# Altium PCB PCB1.PcbDoc
Units mm, origin at the board's own origin, x right, y up, seen from the top; angles counter-clockwise.
Board outline 85.5 x 86.12 mm, 2 copper layers (Top Layer, Bottom Layer); 50 components, 30 nets, 122 pads, 98 vias.
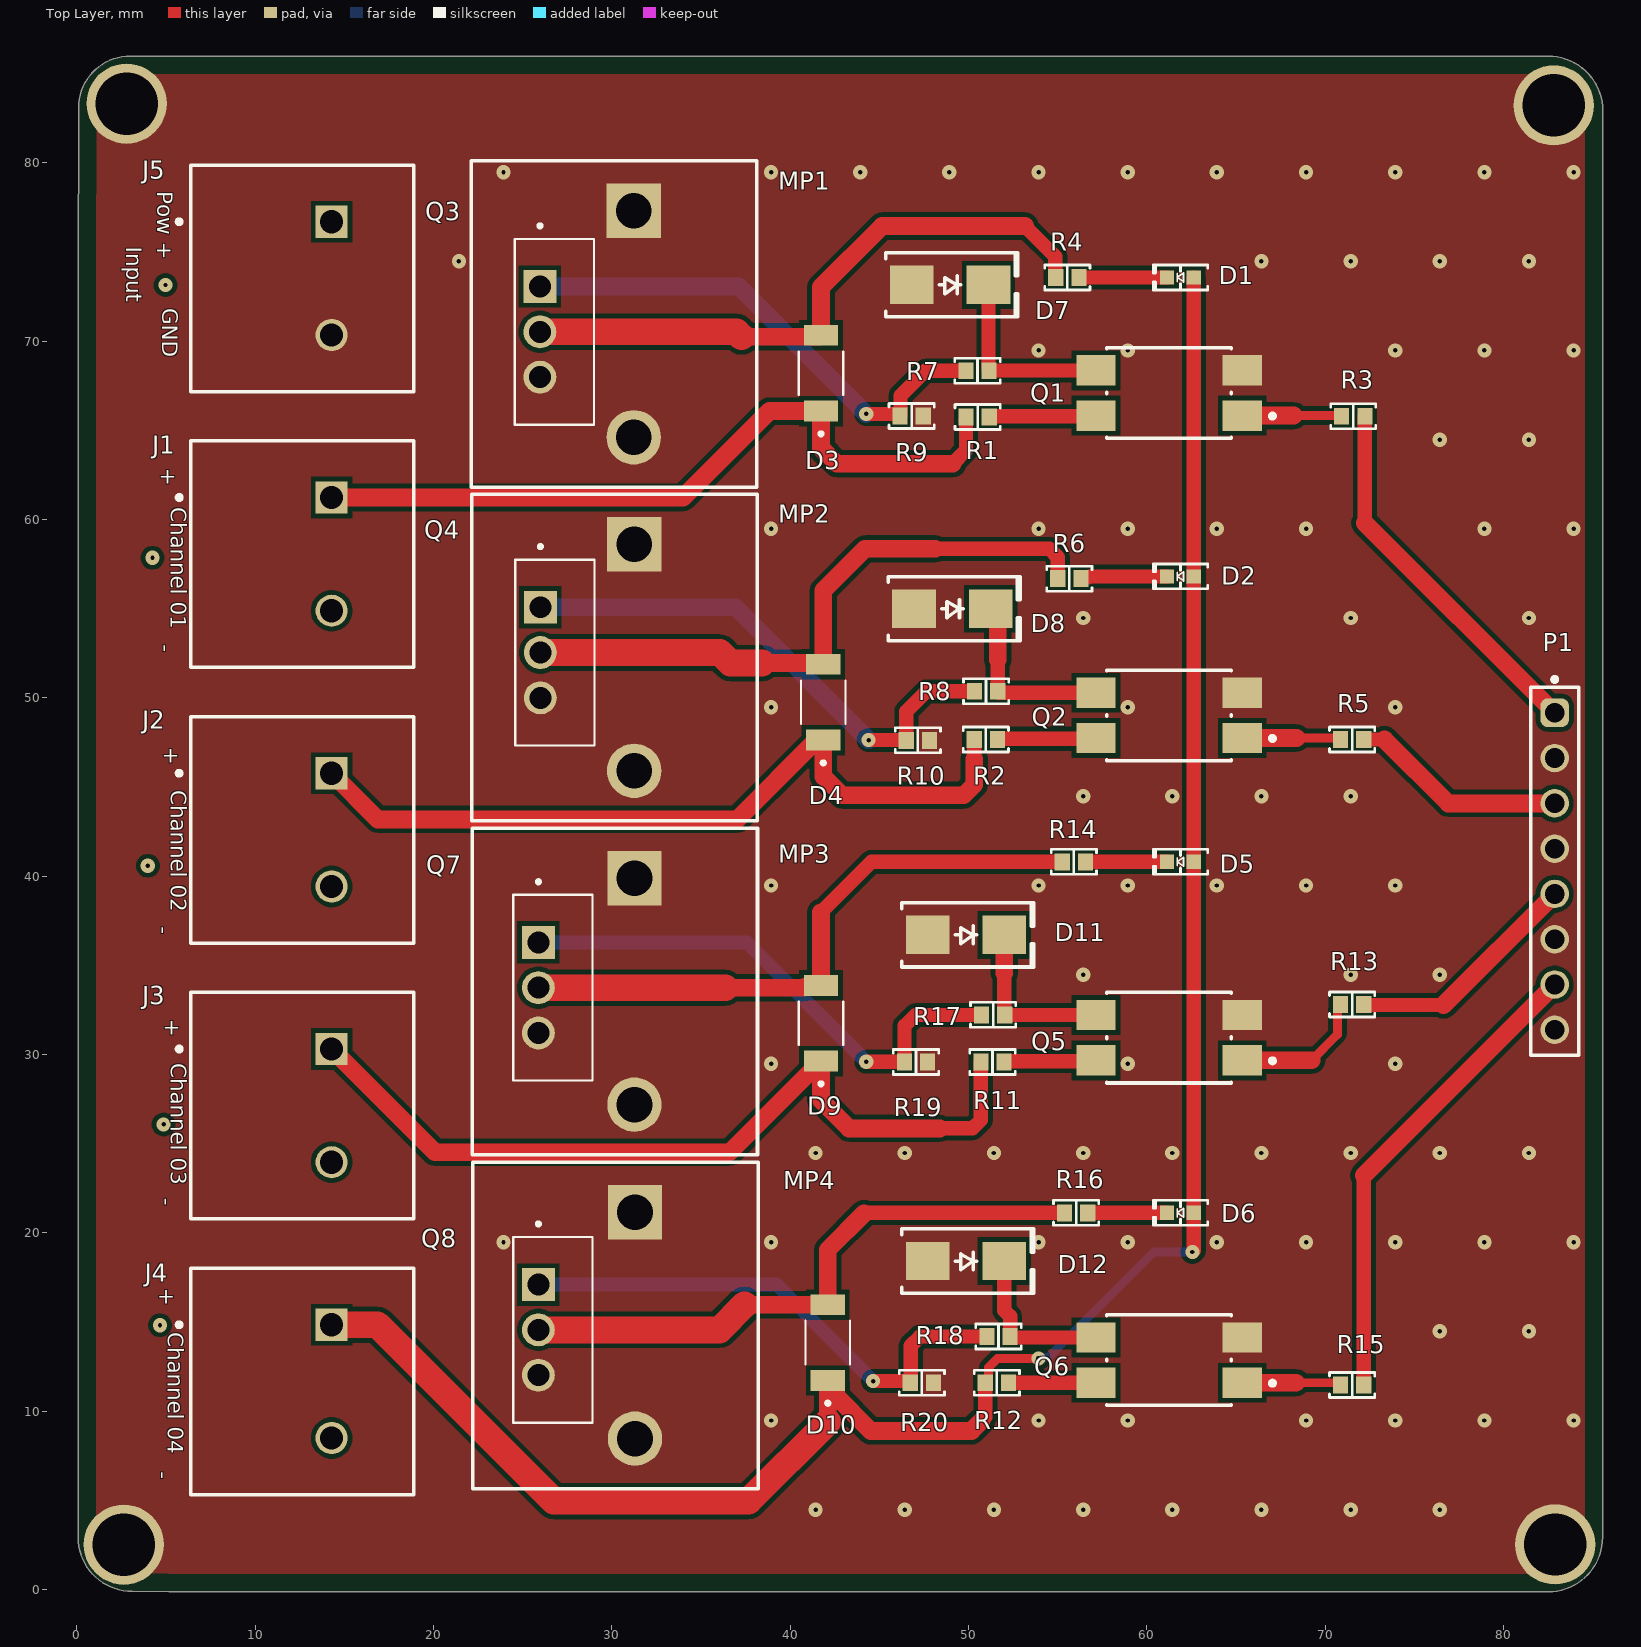
[diagram p0: Top Layer view]
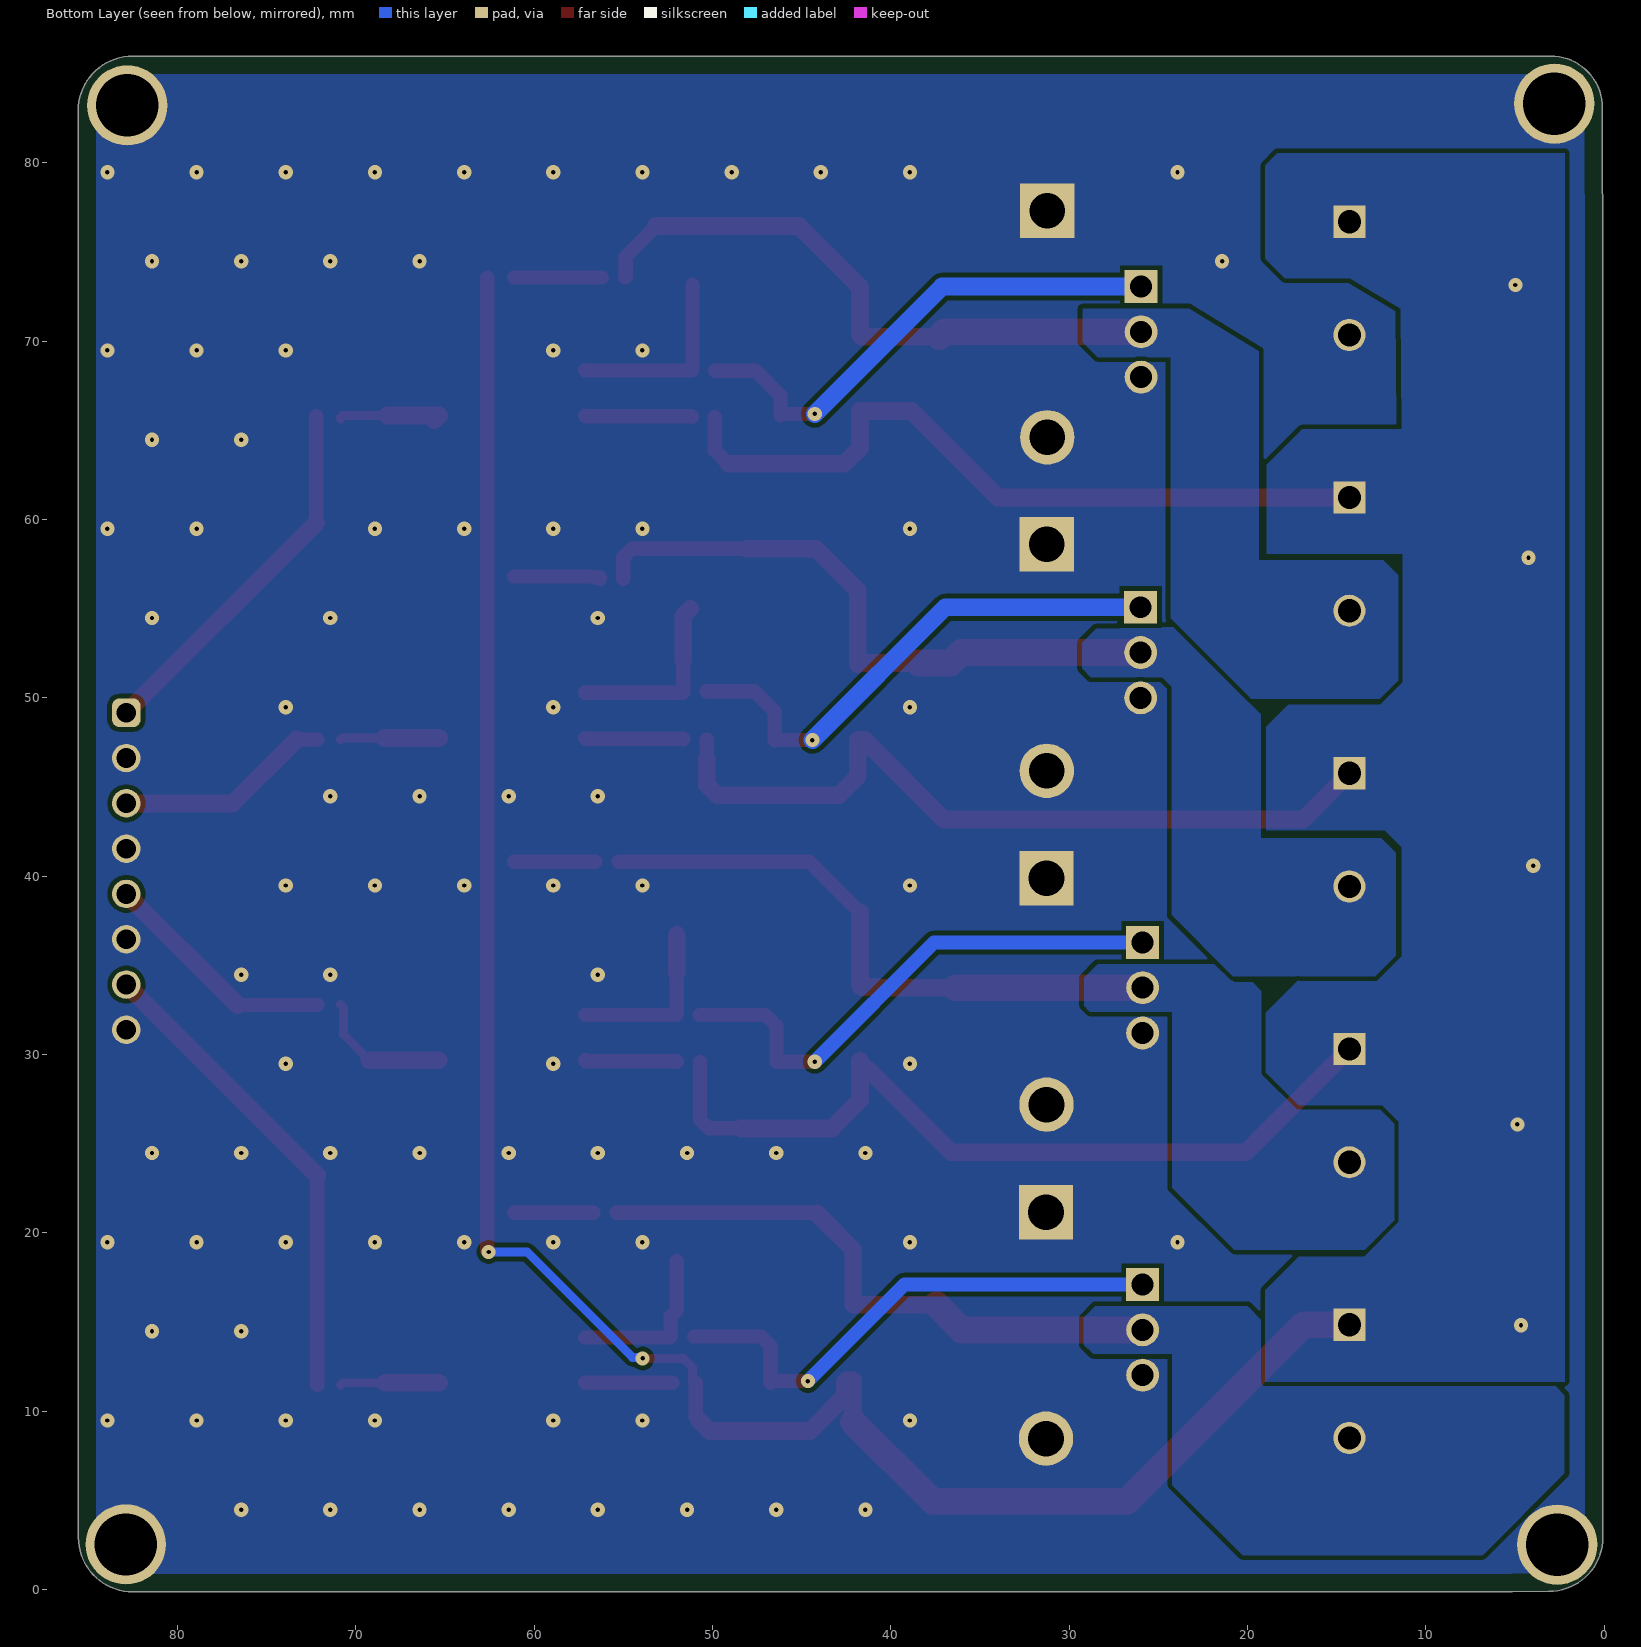
[diagram p1: Bottom Layer view, seen from below]
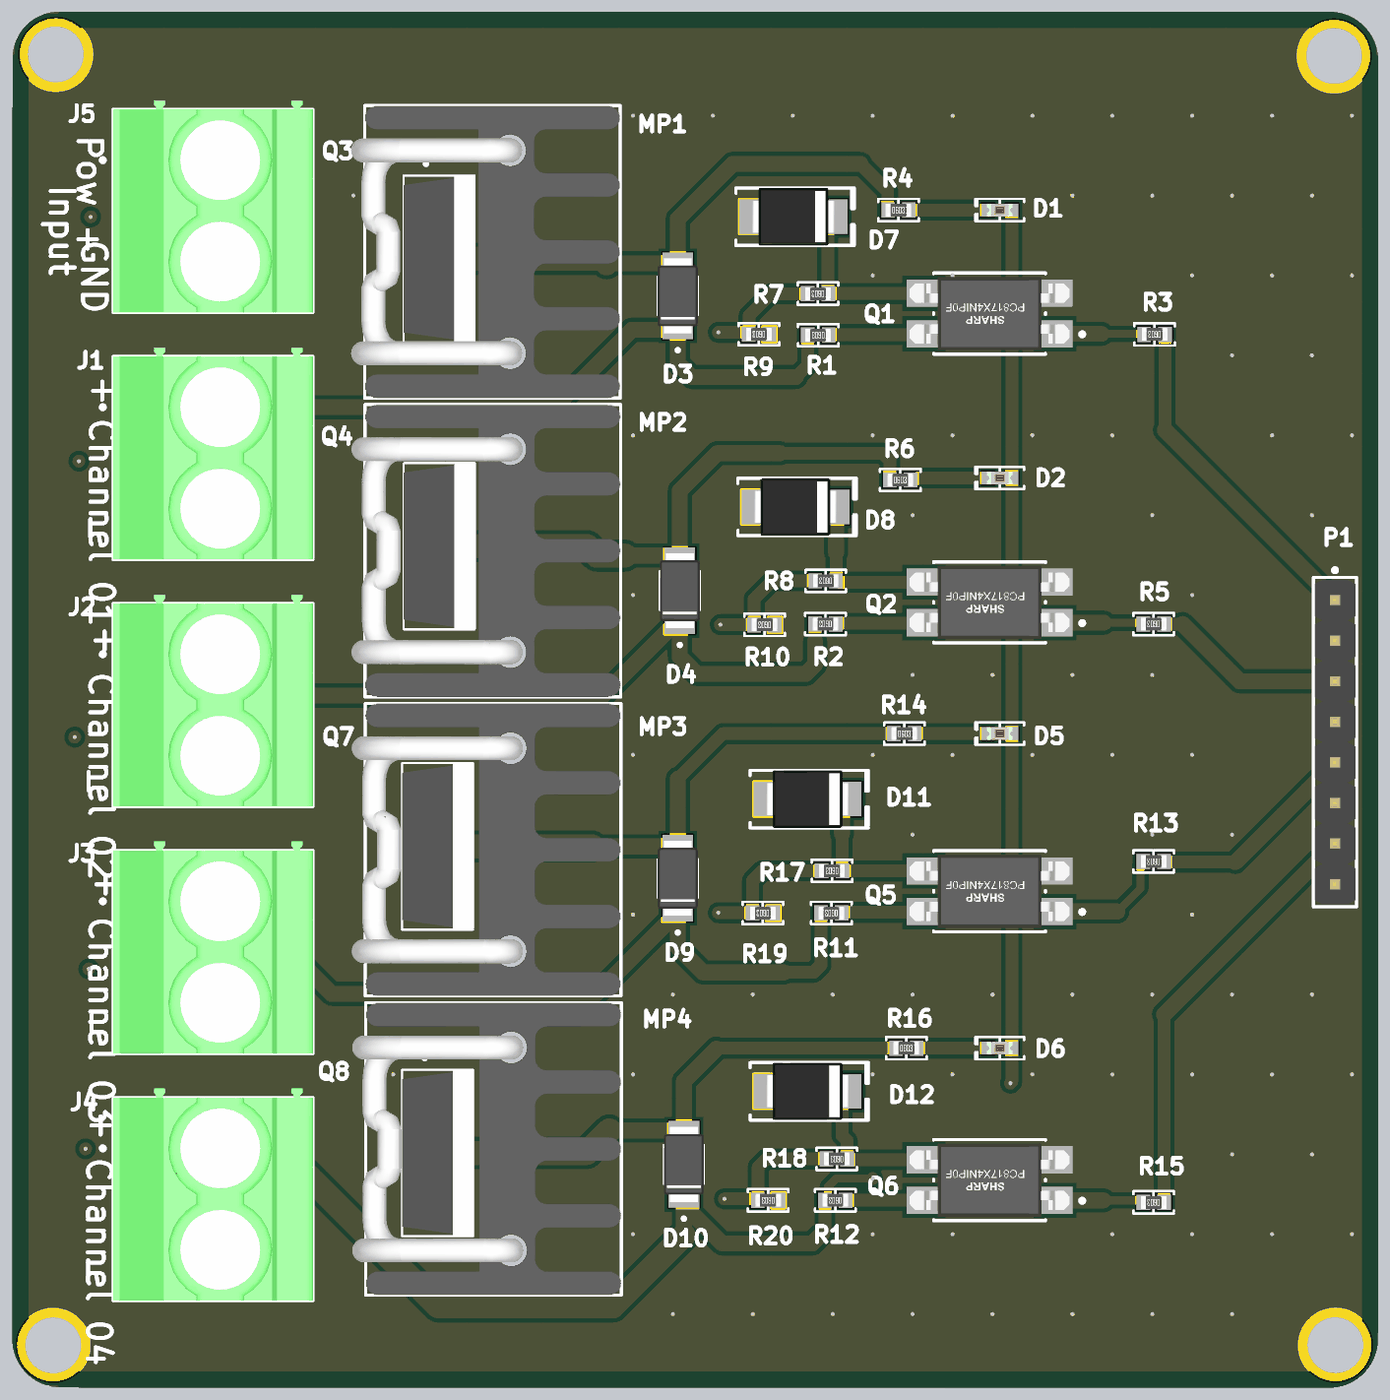
[diagram p2: 3D render of the assembled board from above, using the file's embedded part models]

## Layer stack, top to bottom
Top Solder: solder mask 0.0102, Solder Resist, Dk 3.5
Top Layer: signal copper 0.0356
Dielectric 1: dielectric 0.32, FR-4, Dk 4.8
Bottom Layer: signal copper 0.0356
Bottom Solder: solder mask 0.0102, Solder Resist, Dk 3.5

## Board outline
0.076,2.919 0.076,73.403 0.102,83.072 cw(c3.007,83.072) 3.007,85.976 72.974,85.976 82.51,85.976 cw(c82.51,82.911) 85.575,82.911 85.557,2.92 cw(c82.497,2.92) 82.497,-0.14 5.156,-0.13 3.106,-0.111 cw(c3.106,2.919)

## Design rules (kind name [scope] priority, off if disabled: settings)
BoardOutlineClearance [All] p1: gap=1 ignorepadtopadclearanceinfootprint=FALSE
Clearance "Stitching NetD3_A" [IsStitchingVia and InNet('NetD3_A') vs (IsVia and (Not IsStitchingVia)) Or IsPad] p1: gap=4 ignorepadtopadclearanceinfootprint=FALSE
Clearance [All] p2: gap=0.254 ignorepadtopadclearanceinfootprint=FALSE except(0: Arc-Hole Track-Hole SMDPad-Hole THPad-Hole Via-Hole Fill-Hole Poly-Hole Region-Hole Text-Hole)
ComponentClearance [All] p1: gap=0.01 collisioncheckmode=3 verticalgap=0.01 showdistances=FALSE
Height [All] p1: minheight=0 maxheight=254 prefheight=12.7
HoleSize [All] p1: absolutevalues=TRUE maxlimit=5 minlimit=0.2 maxpercent=80.000 minpercent=20.000
MinimumSolderMaskSliver [All] p1: minsoldermaskwidth=0.001
PolygonConnect [All] p1: connectstyle=Direct reliefconductorwidth=0.254 reliefentries=4 polygonreliefangle="90 Angle" airgapwidth=0.254
RoutingVias [All] p1: holewidth=0.711 width=1.27 viastyle="Through Hole" minholewidth=0.2 minwidth=0.8 maxholewidth=0.711 maxwidth=1.27
SilkToSolderMaskClearance [IsPad] p1: minsilkscreentomaskgap=1 clearancetoexposedcopper=TRUE
SolderMaskExpansion [All] p1: expansion=0.102 istentingtop=FALSE
Width [All] p1: maxlimit=5 minlimit=0.254 preferedwidth=0.254
25 further rules are at their usual default settings.

## Components (designator, comment, footprint, x,y, rotation, side; value= is the part's Value field where it differs from the comment)
D1 "Red" "LED 0603_1608 RED" 61.887,73.564 r180 top
D2 "Red" "LED 0603_1608 RED" 61.887,56.8 r180 top
D3 "SS54FSH" SODFL4725X110N 41.732,68.196 r90 top
D4 "SS54FSH" SODFL4725X110N 41.859,49.747 r90 top
D5 "Red" "LED 0603_1608 RED" 61.887,40.798 r180 top
D6 "Red" "LED 0603_1608 RED" 61.887,21.113 r180 top
D7 "SMBJ5349B" "DO214AA SMB" 48.971,73.149 r0 top
D8 "SMBJ5349B" "DO214AA SMB" 49.098,54.988 r0 top
D9 "SS54FSH" SODFL4725X110N 41.732,31.747 r90 top
D10 "SS54FSH" SODFL4725X110N 42.113,13.84 r90 top
D11 "SMBJ5349B" "DO214AA SMB" 49.86,36.7 r0 top
D12 "SMBJ5349B" "DO214AA SMB" 49.86,18.412 r0 top
J1 "1714955" PHOE-1714955_V 14.293,58.052 r270 top
J2 "1714955" PHOE-1714955_V 14.293,42.59 r270 top
J3 "1714955" PHOE-1714955_V 14.293,27.127 r270 top
J4 "1714955" PHOE-1714955_V 14.293,11.665 r270 top
J5 "1714955" PHOE-1714955_V 14.293,73.514 r270 top
MP1 "WA-T220-101E" FP-WA-T220-101E-MFG 30.132,70.95 r270 top
MP2 "WA-T220-101E" FP-WA-T220-101E-MFG 30.156,52.248 r270 top
MP3 "WA-T220-101E" FP-WA-T220-101E-MFG 30.173,33.534 r270 top
MP4 "WA-T220-101E" FP-WA-T220-101E-MFG 30.202,14.806 r270 top
P1 "61300811121" 61300811121 82.87,40.266 r270 top
Q1 "PC817X4NIP0F" FP-PC817X4NIP0F-MFG 61.247,67.087 r180 top
Q2 "PC817X4NIP0F" FP-PC817X4NIP0F-MFG 61.247,49.011 r180 top
Q3 "IRL540N" TO254P1054X469X1930-3 26.782,70.516 r270 top
Q4 "IRL540N" TO254P1054X469X1930-3 26.806,52.531 r270 top
Q5 "PC817X4NIP0F" FP-PC817X4NIP0F-MFG 61.247,30.934 r180 top
Q6 "PC817X4NIP0F" FP-PC817X4NIP0F-MFG 61.247,12.858 r180 top
Q7 "IRL540N" TO254P1054X469X1930-3 26.696,33.739 r270 top
Q8 "IRL540N" TO254P1054X469X1930-3 26.694,14.552 r270 top
R1 "4.7 kOhms" "RES 0603_1608" 50.519,65.737 r180 top
R2 "4.7 kOhms" "RES 0603_1608" 50.975,47.656 r180 top
R3 "1 kOhms" "RES 0603_1608" 71.577,65.783 r180 top
R4 "4.7 kOhms" "RES 0603_1608" 55.547,73.564 r0 top
R5 "1 kOhms" "RES 0603_1608" 71.519,47.656 r180 top
R6 "4.7 kOhms" "RES 0603_1608" 55.659,56.673 r0 top
R7 "100 Ohms" "RES 0603_1608" 50.509,68.332 r180 top
R8 "100 Ohms" "RES 0603_1608" 50.989,50.36 r180 top
R9 "4.7 kOhms" "RES 0603_1608" 46.813,65.796 r180 top
R10 "4.7 kOhms" "RES 0603_1608" 47.166,47.608 r180 top
R11 "4.7 kOhms" "RES 0603_1608" 51.347,29.57 r180 top
R12 "4.7 kOhms" "RES 0603_1608" 51.595,11.588 r180 top
R13 "1 kOhms" "RES 0603_1608" 71.519,32.797 r180 top
R14 "4.7 kOhms" "RES 0603_1608" 55.913,40.798 r0 top
R15 "1 kOhms" "RES 0603_1608" 71.519,11.461 r180 top
R16 "4.7 kOhms" "RES 0603_1608" 56.04,21.113 r0 top
R17 "100 Ohms" "RES 0603_1608" 51.385,32.214 r180 top
R18 "100 Ohms" "RES 0603_1608" 51.687,14.177 r180 top
R19 "4.7 kOhms" "RES 0603_1608" 47.059,29.57 r180 top
R20 "4.7 kOhms" "RES 0603_1608" 47.389,11.588 r180 top

## Footprints (in the part's own frame and the unit in brackets; to place one, negate y for a bottom-side part, rotate by r counter-clockwise, add the part's x,y. Pads: shape width x height; smd on the part's side, far side on the other; paste and mask are expansions set on the pad)
61300811121 [mm] "Pin Header, pitch 2.54 mm, THT, Vertical, single row, 8p"
  rrect50% 1.6x1.6 hole 1.1: 1(-8.89,0)
  round 1.6 hole 1.1: 2(-6.35,0) 3(-3.81,0) 4(-1.27,0) 5(1.27,0) 6(3.81,0) 7(6.35,0) 8(8.89,0)
  silkscreen extent -10.88,-1.35 10.31,1.35, body extent -10.16,-1.27 10.16,1.27, height 8.57
"DO214AA SMB" [mm] "Molded Diode, 2-Leads, Body 4.31x3.62mm, IPC Medium Density"
  rect 2.45x2.15 smd: 1(-2.15,0) 2(2.15,0)
  silkscreen extent -3.6,-1.8 3.8,1.8, body extent -2.6,-1.8 2.6,1.8, height 2.4
FP-PC817X4NIP0F-MFG [mm]
  rect 2.2x1.7 smd paste+0 mask+0: 1(-4.1,1.27) 2(-4.1,-1.27) 3(4.1,-1.27) 4(4.1,1.27)
  silkscreen extent -5.93,-2.54 3.5,2.54, body extent -5.3,-2.64 5.3,2.64, height 0.25
FP-WA-T220-101E-MFG [mm]
  rect 3.05x3.05 hole 2 paste-2539.97 mask+0: 1(-6.35,1.1)
  round 3.05 hole 2 paste-2539.97 mask+0: 2(6.35,1.1)
  silkscreen extent -9.15,-8 9.15,8, body extent -9.25,-8.1 9.25,8.1, height 0.25
"LED 0603_1608 RED" [mm] "Chip Diode, 2-Leads, Body 1.60x0.80mm, IPC Medium Density"
  rect 0.8x0.8 smd: 1(-0.75,0) 2(0.75,0)
  silkscreen extent -1.52,-0.7 1.52,0.7, body extent -0.8,-0.4 0.8,0.4, height 0.53
PHOE-1714955_V [mm] "Terminal Block, 2-Leads, Body 12.7x12.5mm, Pitch 6.35mm"
  rect 1.8x1.8 hole 1.3: 1(-3.175,0)
  round 1.8 hole 1.3: 2(3.175,0)
  silkscreen extent -6.35,-8.67 6.35,4.6, body extent -6.92,-7.9 6.35,4.6, height 21.51
"RES 0603_1608" [mm] "Chip Resistor, 2-Leads, Body 1.60x0.80mm, IPC Medium Density"
  rect 0.85x0.95 smd: 1(-0.65,0) 2(0.65,0)
  silkscreen extent -1.27,-0.7 1.27,0.7, body extent -0.8,-0.4 0.8,0.4, height 0.45
SODFL4725X110N [mm]
  rect 1.17x1.92 smd: A(2.125,0) C(-2.125,0)
  silkscreen extent -3.5,-1.25 1.22,1.25, body extent -2.35,-1.25 2.35,1.25, height 1.1
TO254P1054X469X1930-3 [mm]
  rect 1.845x1.845 / inner round 1.845 / far side rect 1.845x1.845 hole 1.23: 1(-2.54,-0.81)
  round 1.845 hole 1.23: 2(0,-0.81) 3(2.54,-0.81)
  silkscreen extent -6.04,-2.22 5.21,2.22, body extent -5.21,-2.22 5.21,2.22, height 19.3

## Part data
D1 D2 D5 D6: library part 5973005507F, "LED RED 0603 SMD", Current - Test=20mA, Device Package="0603 (1608 Metric)", Lens Color=0.68mm, manufacturer=Dialight, Millicandela Rating=90mcd, Supplier Device Package=0603, Supplier Part Number 1=350-4374-1-ND, Voltage - Forward (Vf) (Typ)=2V, Color=Red, componentlink1description=Datasheet, componentlink1url=http://www.dialightsignalsandcomponents.com/Assets/Drawings/2D_Drawings_DrawingDetailedSpec/NewDrawings/18369A.pdf, componentlink2description="DigiKey Link", componentlink2url=https://www.digikey.com/en/products/detail/dialight/5973005507F/9385429, Configuration=Standard, Height (Max)=0.68mm, lastupdated="6/3/2024 7:59:48 PM", Lens Size="1.20mm x 0.80mm", Lens Style="Rectangle with Flat Top", Lifecycle Status=Active, Minimum Order=1, Mounting Type="Surface Mount", Package / Case="0603 (1608 Metric)", packaging=TapeAndReel, Part Number=5973005507F, Part Status=Active, partid=378, Price=0.08, series=597, Size / Dimension="1.60mm L x 0.80mm W", Supplier 1=DigiKey, Wavelength - Dominant=630nm
D3 D4 D9 D10: "5A, 40V, Schottky Rectifier", Package="SOD-128-2 Taiwan Semiconductor", Availability="In Stock", Check_prices=https://www.snapeda.com/parts/SS54FSH/Taiwan+Semiconductor/view-part/?ref=eda, MF="Taiwan Semiconductor", MP=SS54FSH, Price=None, SnapEDA_Link=https://www.snapeda.com/parts/SS54FSH/Taiwan+Semiconductor/view-part/?ref=snap
D7 D8 D11 D12: library part SMBJ5349B-TP, "DIODE ZENER 12V 5W DO214AA", Current - Reverse Leakage @ Vr="2 µA @ 9.1 V", manufacturer="Micro Commercial Co", Operating Temperature="-55°C ~ 150°C", Package / Case="DO-214AA, SMB", Power - Max="5 W", Supplier Device Package="DO-214AA (SMB)", Supplier Part Number 1=SMBJ5349B-TPMSCT-ND, Tolerance=±5%, Voltage - Forward (Vf) (Max) @ If="1.2 V @ 1 mA", Voltage - Zener (Nom) (Vz)="12 V", componentlink1description=Datasheet, componentlink1url=https://www.mccsemi.com/pdf/Products/SMBJ5338B-SMBJ5388B(SMB).pdf, componentlink2description="DigiKey Link", componentlink2url=https://www.digikey.com/en/products/detail/micro-commercial-co/SMBJ5349B-TP/1636171, Impedance (Max) (Zzt)="2.5 Ohms", lastupdated="6/3/2024 7:55:14 PM", Lifecycle Status=Active, Minimum Order=1, Mounting Type="Surface Mount", packaging=TapeAndReel, Part Number=SMBJ5349B-TP, Part Status=Active, partid=1041, Price=0.10, series=-, Supplier 1=DigiKey
J1 J2 J3 J4 J5: library part CMP-2000-05797-1, "PC Terminal Block, Pitch 6.35 mm, 1 x 2 Position, Height 21.5 mm, Tail Lenght 5.1 mm, RoHS, Bulk", manufacturer="Phoenix Contact", Package Description="PC Terminal Block, Pitch 6.35 mm, 1 x 2 Position, Height 21.5 mm, Tail Lenght 5.1 mm", Datasheet URL=http://media.digikey.com/pdf/Data%20Sheets/Phoenix%20Contact%20PDFs/1714955.pdf, Datasheet Version=02/2010, Manufacturer URL=http://www.phoenixcontact.com/, Mounting Technology=ThroughHole, Package Reference=1714955
MP1 MP2 MP3 MP4: library part CMP-33535-000033-1, "HEATSINK AND CLIP FOR TO-220 BLK", Case/Package=TO-220, Color=Black, Natural Thermal Resistance=12°C/W, Package Quantity=1, Finish=Anodized, Height=30.5mm, Height Off Base=0.63inch, Length=1.201inch, Material=Aluminium, Mount=Clip, Package Cooled=TO-220, packaging=Bulk, RoHS Compliant=Yes, series=W, Shape=Fins, Type=Passive, Weight=0.35oz, Width=0.72inch
P1: library part CMP-1502-01076-3, Color=Black, Contact Resistance=20mΩ, Current Rating=3A, Max Operating Temperature=105°C, Min Operating Temperature=-40°C, Operating Supply Voltage=250V, Connector Type="Male Pin", Contact Material=Copper, Contact Mating Length=5.9944mm, Contact Plating=Gold, Gender=Male, Height=8.54mm, Lead Pitch=2.54mm, Mount="Through Hole", NexarPartId=32855533, Number of Contacts=8, Number of Pins=8, Number of Positions=8, Number of Rows=1, Orientation=Vertical, packaging=Bulk, Pitch=2.54mm, REACH SVHC=Unknown, RoHS=Compliant, Termination=Solder, Voltage Rating=250V
Q1 Q2 Q5 Q6: library part CMP-65434-000001-1, "OPTOISOLATOR 5KV TRANS 4SMD", Collector Emitter Voltage=80V, Emiiter Collector Voltage=6V, Forward Current=20mA, Forward Voltage=1.2V, Isolation Voltage=5kVrms, manufacturer=Sharp, Max Current Transfer Ratio=600%, Min Current Transfer Ratio=50%, Power Dissipation=200mW, Temperature="-30°C to +100°C", Temperature Range High=+100°C, Temperature Range Low=-30°C, Automotive=No, Category=Trans, componentlink2description=Datasheet, componentlink2url=https://www.sharpsde.com/fileadmin/products/Optoelectronics/Isolation%20Devices/Specs%20Photocoupler/PC817XxNIP0F_17Jun08_Spec_ED-04P129A.pdf, Device Class L1=Optoelectronics, Device Class L2=Optocouplers, Device Class L3=unset, Digikey Description="OPTOISOLATOR 5KV TRANS 4SMD", Height=4.6mm, Lead Free=Yes, Manufacturer Part Number=PC817X4NIP0F, Mouser Description="Transistor Output Optocouplers Photocoupler 300-600% CRT", Octopart=https://octopart.com/pc817x4nip0f-sharp-20650453, Package=PC817X4NIP0F, Reverse Voltage=6V, RoHS=TRUE, Standoff Height=0.1mm
Q3 Q4 Q7 Q8: library part IRF540NPBF, "RoHS Compliant", Package="TO-220 Infineon", Availability="In Stock", Check_prices=https://www.snapeda.com/parts/IRF540NPBF/Infineon+Technologies/view-part/?ref=eda, MF=Infineon, MP=IRF540NPBF, Price=None, Purchase-URL=https://pricing.snapeda.com/search/part/IRF540NPBF/?ref=eda, SnapEDA_Link=https://www.snapeda.com/parts/IRF540NPBF/Infineon+Technologies/view-part/?ref=snap
R1 R2 R4 R6 R9 R10 R11 R12 R14 R16 R19 R20: library part ERA-3AEB472V, "RES SMD 4.7K OHM 0.1% 1/10W 0603", Device Package="0603 (1608 Metric)", manufacturer="Panasonic Electronic Components", Operating Temperature="-55°C ~ 155°C", Power (Watts)="0.1W, 1/10W", Ratings=AEC-Q200, Supplier Device Package=0603, Supplier Part Number 1=P4.7KDBCT-ND, Temperature Coefficient=±25ppm/°C, Tolerance=±0.1%, componentlink1description=Datasheet, componentlink1url=https://industrial.panasonic.com/cdbs/www-data/pdf/RDM0000/AOA0000C307.pdf, componentlink2description="DigiKey Link", componentlink2url=https://www.digikey.com/en/products/detail/panasonic-electronic-components/ERA-3AEB472V/1465870, Composition="Thin Film", Features="Automotive AEC-Q200", Height - Seated (Max)="0.022\" (0.55mm)", lastupdated="2/9/2024 8:43:34 PM", Lifecycle Status=Active, Minimum Order=1, Number of Terminations=2, Package / Case="0603 (1608 Metric)", packaging=TapeAndReel, Part Number=ERA-3AEB472V, Part Status=Active, partid=5519, Price=0.03, Resistance="4.7 kOhms", series=ERA-3A, Size / Dimension="0.063\" L x 0.031\" W (1.60mm x 0.80mm)", Supplier 1=DigiKey
R3 R5 R13 R15: library part CPF0603B1K0E, "RES SMD 1K OHM 0.1% 1/16W 0603", Device Package="0603 (1608 Metric)", manufacturer="TE Connectivity Passive Product", Operating Temperature="-55°C ~ 155°C", Power (Watts)="0.063W, 1/16W", Supplier Device Package=0603, Supplier Part Number 1=A119887CT-ND, Temperature Coefficient=±25ppm/°C, Tolerance=±0.1%, componentlink1description=Datasheet, componentlink1url=https://www.te.com/commerce/DocumentDelivery/DDEController?Action=srchrtrv&DocNm=1773200&DocType=DS&DocLang=English, componentlink2description="DigiKey Link", componentlink2url=https://www.digikey.com/en/products/detail/te-connectivity-passive-product/CPF0603B1K0E/2390473, Composition="Thin Film", Height - Seated (Max)="0.022\" (0.55mm)", lastupdated="2/9/2024 8:43:37 PM", Lifecycle Status=Active, Minimum Order=1, Number of Terminations=2, Package / Case="0603 (1608 Metric)", packaging=TapeAndReel, Part Number=CPF0603B1K0E, Part Status=Active, partid=4877, Price=0.09, Resistance="1 kOhms", series="CPF, Neohm", Size / Dimension="0.061\" L x 0.031\" W (1.55mm x 0.80mm)", Supplier 1=DigiKey
R7 R8 R17 R18: library part RNCS0603BKE100R, "RES 100 OHM 0.1% 1/16W 0603", Device Package="0603 (1608 Metric)", manufacturer="Stackpole Electronics Inc", Operating Temperature="-55°C ~ 155°C", Power (Watts)="0.063W, 1/16W", Ratings=AEC-Q200, Supplier Device Package=0603, Supplier Part Number 1=RNCS0603BKE100RCT-ND, Temperature Coefficient=±25ppm/°C, Tolerance=±0.1%, componentlink1description=Datasheet, componentlink1url=https://www.seielect.com/catalog/sei-rncs_rnch.pdf, componentlink2description="DigiKey Link", componentlink2url=https://www.digikey.com/en/products/detail/stackpole-electronics-inc/RNCS0603BKE100R/1799988, Composition="Thin Film", Features="Anti-Corrosive, Automotive AEC-Q200, Moisture Resistant", Height - Seated (Max)="0.022\" (0.55mm)", lastupdated="2/9/2024 8:43:37 PM", Lifecycle Status=Active, Minimum Order=1, Number of Terminations=2, Package / Case="0603 (1608 Metric)", packaging=TapeAndReel, Part Number=RNCS0603BKE100R, Part Status=Active, partid=4839, Price=0.06, Resistance="100 Ohms", series=RNCS, Size / Dimension="0.061\" L x 0.031\" W (1.55mm x 0.80mm)", Supplier 1=DigiKey

## Free pads (board coordinates)
  round 4.5 hole 3.5 unplated paste-2539.97: MH25(2.638,2.51) MH25(2.798,83.31) MH25(82.818,83.21) MH25(82.898,2.52)

## Via types
v1: diameter 0.8, hole 0.25, Top Layer to Bottom Layer, 98 vias

## Nets (pads, with @x,y where several pads share a name; then routed paths per layer and width w, separated by ;. In a path a pad name is that pad's centre, name@x,y a point inside that pad or via, vN(x,y) a via of type N, cw(c..) or ccw(c..) an arc to the next point about the centre after c; other vN are vias at no path point)
CH_01: P1.1 R3.1 | length 21
  Top Layer w0.8: 72.227,59.799 R3.1
  Top Layer w1: 72.227,59.799 P1.1
CH_02: P1.3 R5.1 | length 12.2
  Top Layer w0.8: R5.1 73.321,47.656
  Top Layer w1: 73.321,47.656 76.901,44.076 P1.3
CH_03: P1.5 R13.1 | length 13.3
  Top Layer w0.8: R13.1 ccw(c72.203,32.797) 72.203,32.763 76.637,32.763
  Top Layer w1: 76.637,32.763 P1.5
CH_04: P1.7 R15.1 | length 26.9
  Top Layer w0.8: R15.1 72.169,23.215
  Top Layer w1: 72.169,23.215 P1.7
GND: D7.1 D8.1 D11.1 D12.1 J5.2 MP1.1 MP1.2 MP2.1 MP2.2 MP3.1 MP3.2 MP4.1 MP4.2 P1.2 P1.4 P1.6 P1.8 pad.MH25 Q1.2 Q2.2 Q3.3 Q4.3 Q5.2 Q6.2 Q7.3 Q8.3 R9.1 R10.1 R19.1 R20.1
  other v1: 41.43,4.47 46.43,4.47 51.43,4.47 56.43,4.47 61.43,4.47 66.43,4.47 71.43,4.47 76.43,4.47 38.93,9.47 53.93,9.47 58.93,9.47 68.93,9.47 73.93,9.47 78.93,9.47 83.93,9.47 76.43,14.47 81.43,14.47 23.93,19.47 38.93,19.47 53.93,19.47 58.93,19.47 63.93,19.47 68.93,19.47 73.93,19.47 78.93,19.47 83.93,19.47 41.43,24.47 46.43,24.47 51.43,24.47 56.43,24.47 61.43,24.47 66.43,24.47 71.43,24.47 76.43,24.47 81.43,24.47 38.93,29.47 58.93,29.47 73.93,29.47 56.43,34.47 71.43,34.47 76.43,34.47 38.93,39.47 53.93,39.47 58.93,39.47 63.93,39.47 68.93,39.47 73.93,39.47 56.43,44.47 61.43,44.47 66.43,44.47 71.43,44.47 38.93,49.47 58.93,49.47 73.93,49.47 56.43,54.47 71.43,54.47 81.43,54.47 38.93,59.47 53.93,59.47 58.93,59.47 63.93,59.47 68.93,59.47 78.93,59.47 83.93,59.47 76.43,64.47 81.43,64.47 53.93,69.47 58.93,69.47 73.93,69.47 78.93,69.47 83.93,69.47 21.43,74.47 66.43,74.47 71.43,74.47 76.43,74.47 81.43,74.47 23.93,79.47 38.93,79.47 43.93,79.47 48.93,79.47 53.93,79.47 58.93,79.47 63.93,79.47 68.93,79.47 73.93,79.47 78.93,79.47 83.93,79.47
NetD1_2: D1.2 R4.2 | length 4.9
  Top Layer w0.8: R4.2 D1.2
NetD2_2: D2.2 R6.2 | length 4.9
  Top Layer w0.8: R6.2 56.309,56.723 56.334,56.748 56.718,56.748 56.77,56.8 D2.2
NetD3_A: D3.A J1.2 Q3.2 R4.1 | length 35.1
  Top Layer w0.8: 53.162,76.451 54.872,74.741 54.872,73.589 R4.1
  Top Layer w1: 37.279,70.236 41.647,70.236 D3.A 41.732,73.022 45.161,76.451 53.162,76.451
  Top Layer w1.5: Q3.2 36.999,70.516 37.279,70.236
NetD4_A: D4.A J2.2 Q4.2 R6.1 | length 35.8
  Top Layer w0.8: 48.14,58.348 54.54,58.348 55.009,57.879 R6.1
  Top Layer w1: 38.43,51.94 41.791,51.94 D4.A 41.859,56.004 44.203,58.348 48.14,58.348
  Top Layer w1.5: Q4.2 36.061,52.531 36.652,51.94 38.43,51.94
NetD5_2: D5.2 R14.2 | length 4.6
  Top Layer w0.8: R14.2 D5.2
NetD6_2: D6.2 R16.2 | length 4.4
  Top Layer w0.8: R16.2 D6.2
NetD7_2: D7.2 Q1.3 R7.1 | length 10.8
  Top Layer w0.8: D7.2 51.121,68.42 51.171,68.37 51.171,68.344 57.135,68.344 Q1.3
NetD8_2: D8.2 Q2.3 R8.1 | length 10.4
  Top Layer w0.8: 51.639,52.125 R8.1 51.639,50.31 51.664,50.285 51.714,50.285 51.718,50.281 Q2.3
  Top Layer w1: D8.2 51.639,54.597 51.639,52.125
NetD9_A: D9.A J3.2 Q7.2 R14.1 | length 34.7
  Top Layer w0.8: 41.732,37.97 44.56,40.798 R14.1
  Top Layer w1: 36.358,33.739 40.761,33.739 40.809,33.787 41.647,33.787 D9.A 41.732,37.97
  Top Layer w1.5: Q7.2 36.358,33.739
NetD10_A: D10.A J4.2 Q8.2 R16.1 | length 34
  Top Layer w0.8: 44.147,21.081 44.179,21.113 R16.1
  Top Layer w1: 37.448,15.965 D10.A 42.113,19.047 44.147,21.081
  Top Layer w1.5: Q8.2 36.035,14.552 37.448,15.965
NetD11_2: D11.2 Q5.3 R17.1 | length 9.6
  Top Layer w0.8: 52.01,34.55 52.01,32.239 R17.1 52.04,32.209 57.142,32.209 Q5.3
  Top Layer w1: 52.01,34.55 D11.2
NetD12_2: D12.2 Q6.3 R18.1 | length 9.2
  Top Layer w0.8: D12.2 52.01,15.638 52.337,15.311 R18.1 ; R18.1@52.362,14.128 Q6.3
NetQ1_1: Q1.1 R3.2 | length 6
  Top Layer w0.5: 68.241,65.817 70.752,65.817 70.869,65.7 R3.2@70.869,65.613
  Top Layer w1: Q1.1@65.601,65.563 Q1.1 68.241,65.817
NetQ1_4: Q1.4 R1.1 | length 6
  Top Layer w0.8: R1.1 51.169,65.752 51.194,65.777 57.107,65.777 Q1.4
NetQ2_1: Q2.1 R5.2 | length 5.6
  Top Layer w0.5: 68.394,47.741 70.784,47.741 R5.2
  Top Layer w1: Q2.1 68.394,47.741
NetQ2_4: Q2.4 R2.1 | length 5.6
  Top Layer w0.8: R2.1 51.625,47.673 51.65,47.698 57.105,47.698 Q2.4
NetQ3_1: Q3.1 R7.2 R9.2 | length 28.6
  Top Layer w0.8: v1(44.272,65.91) 46.099,65.91 46.138,65.871 46.188,65.821 46.188,66.937 47.583,68.332 R7.2
  Bottom Layer w1: Q3.1 37.126,73.056 v1(44.272,65.91)
NetQ4_1: Q4.1 R8.2 R10.2 | length 29.5
  Top Layer w0.8: v1(44.399,47.622) 46.502,47.622 R10.2 46.516,49.231 47.645,50.36 R8.2
  Bottom Layer w1: Q4.1 36.95,55.071 v1(44.399,47.622)
NetQ5_1: Q5.1 R13.2 | length 7.7
  Top Layer w0.5: 69.244,29.668 70.694,31.118 70.694,32.622 R13.2
  Top Layer w1: Q5.1@65.35,29.668 69.244,29.668
NetQ5_4: Q5.4 R11.1 | length 5.2
  Top Layer w0.8: R11.1 51.997,29.592 52.022,29.617 57.1,29.617 Q5.4
NetQ6_1: Q6.1 R15.2 | length 5.6
  Top Layer w0.5: 68.368,11.588 70.742,11.588 R15.2
  Top Layer w1: Q6.1 68.368,11.588
NetQ6_4: Q6.4 R12.1 | length 4.9
  Top Layer w0.8: R12.1 Q6.4
NetQ7_1: Q7.1 R17.2 R19.2 | length 29.9
  Top Layer w0.8: v1(44.272,29.588) 46.391,29.588 R19.2 46.409,31.598 47.025,32.214 R17.2
  Bottom Layer w0.8: Q7.1 37.581,36.279 v1(44.272,29.588)
NetQ8_1: Q8.1 R18.2 R20.2 | length 29.7
  Top Layer w0.8: v1(44.653,11.681) 46.646,11.681 46.664,11.663 46.714,11.663 46.739,11.638 R20.2 ; R20.2@46.764,11.604 46.764,13.665 47.276,14.177 R18.2
  Bottom Layer w0.8: Q8.1 39.242,17.092 v1(44.653,11.681)
P_W: D1.1 D2.1 D3.C D4.C D5.1 D6.1 D9.C D10.C J1.1 J2.1 J3.1 J4.1 J5.1 R1.2 R2.2 R11.2 R12.2 | length 251.7
  Top Layer w0.5: R1.2@49.694,65.562 R1.2 ; R12.2 51.12,11.763 51.12,12.433 51.638,12.951 v1(53.924,12.951)
  Top Layer w0.8: 48.388,25.853 50.228,25.853 50.697,26.322 R11.2 ; 49.116,63.116 49.869,63.869 R1.2 ; 50.325,46.563 R2.2 ; 50.749,9.473 50.945,9.669 R12.2 ; v1(62.56,18.92) 62.637,18.997 D5.1 D2.1 D1.1
  Top Layer w1: J3.1 20.087,24.508 36.618,24.508 D9.C@41.272,29.162 ; J2.1 16.88,43.177 37.039,43.177 41.484,47.622 D4.C 41.859,45.59 42.918,44.531 49.739,44.531 50.325,45.117 50.325,46.563 ; J1.1 34.001,61.227 38.845,66.071 D3.C 41.732,64.005 42.621,63.116 49.116,63.116 ; D9.C 41.732,27.429 43.308,25.853 48.388,25.853 ; 42.113,9.395 D10.C 42.488,11.715 42.573,11.63 42.573,10.84 44.526,8.887 50.163,8.887 50.749,9.473
  Top Layer w1.5: J4.1 16.856,14.84 26.746,4.95 37.668,4.95 42.113,9.395
  Bottom Layer w0.5: v1(53.924,12.951) 53.981,13.008 54.489,13.008 60.401,18.92 v1(62.56,18.92)
  other v1: 4.668,14.81 4.868,26.07 3.988,40.58 4.248,57.85 4.978,73.14

## Polygon pours and split planes (outlines as drawn)
GND on Bottom Layer "NONET_L-01_P-001" (solid, pour order 6): 82.506,85.98 cw(c82.506,82.908) 85.578,82.908 85.578,2.941 cw(c82.507,2.941) 82.507,-0.13 3.678,-0.13 3.678,-0.12 3.115,-0.12 cw(c3.115,2.917) 0.078,2.917 0.078,83.047 cw(c3.011,83.047) 3.011,85.98 2.618,85.98 2.858,85.98
NetD10_A on Bottom Layer "NONET_L-01_P-001" (solid, pour order 5): 20.004,15.879 19.933,15.808 19.155,15.03 19.155,11.44 2.78,11.44 2.233,10.893 2.233,6.505 6.815,1.923 20.283,1.923 24.21,5.85 24.21,13.203 28.666,13.203 29.177,13.714 29.177,15.229 28.527,15.879 24.261,15.879
NetD9_A on Bottom Layer "NONET_L-01_P-001" (solid, pour order 4): 21.762,35.054 20.752,34.044 19.719,34.044 19.222,33.547 19.222,29.004 17.291,27.073 17.291,26.987 12.576,26.987 11.706,26.117 11.705,26.117 11.705,20.703 13.361,19.047 20.74,19.047 24.226,22.533 24.226,32.402 28.838,32.402 29.177,32.741 29.17,32.748 29.17,34.291 28.407,35.054
NetD4_A on Bottom Layer "NONET_L-01_P-001" (solid, pour order 3): 22.33,52.153 19.255,49.078 19.255,42.117 12.508,42.117 11.684,41.293 11.684,35.531 12.842,34.373 12.856,34.387 20.826,34.387 24.258,37.819 24.258,50.617 24.788,51.147 28.78,51.147 29.282,51.649 29.282,53.089 28.495,53.876 24.131,53.954
NetD3_A on Bottom Layer "NONET_L-01_P-001" (solid, pour order 2): 23.273,71.822 19.369,69.436 19.369,57.718 12.4,57.718 11.477,56.795 11.477,50.978 12.51,49.945 19.801,49.945 24.317,54.461 24.317,69.097 28.408,69.097 29.271,69.96 29.254,69.977 29.254,71.822
P_W on Bottom Layer "NONET_L-01_P-001" (solid, pour order 0): 14.286,73.53 17.904,73.53 18.998,74.624 18.998,79.853 18.322,80.529 18.302,80.529 2.218,80.529 2.218,11.646 14.311,11.646 18.998,11.646 18.998,16.777 19.001,16.78 17.119,18.662 13.453,18.662 11.511,20.604 11.511,26.209 12.454,27.152 17.128,27.152 18.988,29.012 18.988,32.326 17.168,34.146 17.13,34.108 12.748,34.108 11.36,35.496 11.36,41.605 12.32,42.565 18.961,42.565 ccw(c18.961,42.573) 18.953,42.573 18.953,48.362 17.708,49.607 12.553,49.607 11.297,50.863 11.297,58.066 18.937,58.066 18.937,63.004 18.965,63.032 16.946,65.051 11.36,65.051 11.422,71.813 14.283,73.531
no net on Bottom Solder "NONET_L-01_P-001" (solid): 14.278,9.95 20.738,9.95 20.738,15.56 25.868,15.56 ccw(c25.868,14.64) 24.948,14.64 24.948,14.46 ccw(c25.828,14.46) 25.828,13.58 21.978,13.58 21.978,5.8 19.628,3.55 7.078,3.72 3.228,6.84 3.228,9.95
no net on Bottom Solder "NONET_L-01_P-001" (solid): 14.268,25.58 18.358,25.68 20.488,28.1 20.618,33.12 22.738,34.48 25.888,34.75 cw(c25.888,33.79) 26.848,33.79 26.848,33.61 cw(c25.978,33.61) 25.978,32.74 25.928,32.74 22.958,32.72 22.958,27.94 22.848,22.88 19.778,20.03 13.658,19.72 12.428,20.92 12.498,25.54
no net on Bottom Solder "NONET_L-01_P-001" (solid): 14.148,40.82 20.288,40.82 20.338,48.88 24.518,53.33 25.978,53.56 cw(c25.978,52.53) 27.008,52.53 27.008,52.43 cw(c26.098,52.43) 26.098,51.52 26.068,51.52 24.568,51.56 21.568,48.41 21.568,38 19.408,35.77 12.628,35.86 12.658,40.81
no net on Bottom Solder "NONET_L-01_P-001" (solid): 14.278,56.63 20.458,56.63 20.548,68.57 23.701,71.017 25.499,71.43 cw(c25.888,70.817) 25.949,71.54 25.978,71.54 cw(c25.978,70.53) 26.988,70.53 26.988,70.46 cw(c26.028,70.46) 26.028,69.5 23.698,69.5 21.728,67.9 21.718,54.5 18.598,51.52 12.668,51.55 12.638,56.58
no net on Bottom Solder "NONET_L-01_P-001" (solid): 16.414,78.145 17.188,77.27 17.168,75.81 16.228,75.09 12.358,75.12 9.288,73.2 9.378,62.725 16.369,62.755 16.858,62.06 16.828,60.73 16.808,59.88 16.198,59.43 9.308,59.41 9.308,47.48 16.198,47.48 16.708,46.6 16.668,44.8 15.958,44.16 9.348,44.2 9.388,32.175 16.293,32.105 16.858,31.06 16.818,29.04 15.725,28.443 9.348,28.443 9.498,17.66 9.498,16.27 15.878,16.27 16.778,15.6 16.778,13.53 16.028,12.89 6.348,12.82 6.308,78.18
GND on Top Layer "NONET_L-01_P-001" (solid, pour order 7): 82.516,85.98 cw(c82.516,82.908) 85.588,82.908 85.588,2.941 cw(c82.517,2.941) 82.517,-0.13 3.688,-0.13 3.688,-0.12 3.125,-0.12 cw(c3.125,2.917) 0.088,2.917 0.088,83.047 cw(c3.02,83.047) 3.02,85.98 2.628,85.98 2.868,85.98

## Silkscreen, mask and mechanical layers (free items; w line width, h text height)
Top Overlay:
  text "Pow +" at 4.219,78.4 h1.5 r270
  text "Input" at 2.479,75.28 h1.5 r270
  text "GND" at 4.494,71.85 h1.5 r270
  text "+" at 4.61,61.682 h1.5
  text "Channel 01" at 4.974,60.69 h1.5 r270
  text "-" at 5.54,52.56 h1.5 r90
  text "+" at 4.76,46.052 h1.5
  text "Channel 02" at 4.954,44.8 h1.5 r270
  text "-" at 5.43,36.73 h1.5 r90
  text "+" at 4.82,30.792 h1.5
  text "Channel 03" at 4.954,29.5 h1.5 r270
  text "-" at 5.62,21.52 h1.5 r90
  text "+" at 4.51,15.702 h1.5
  text "Channel 04" at 4.804,14.42 h1.5 r270
  text "-" at 5.4,6.18 h1.5 r90
Mechanical 1:
  the board outline again, w0.1

## Dimensions
0.12,83.39 to 85.57,81.39 on Top Layer
2.868,85.98 to 3.406,-0.12 on Top Layer